# Altium PCB KDWM1000_Pcb.PcbDoc
Units mil, origin at the board's own origin, x right, y up, seen from the top; angles counter-clockwise.
Board outline 1300 x 1600 mil, 2 copper layers (Top Layer, Bottom Layer), stack 12.8 mil thick; 53 components, 66 nets, 250 pads, 154 vias.
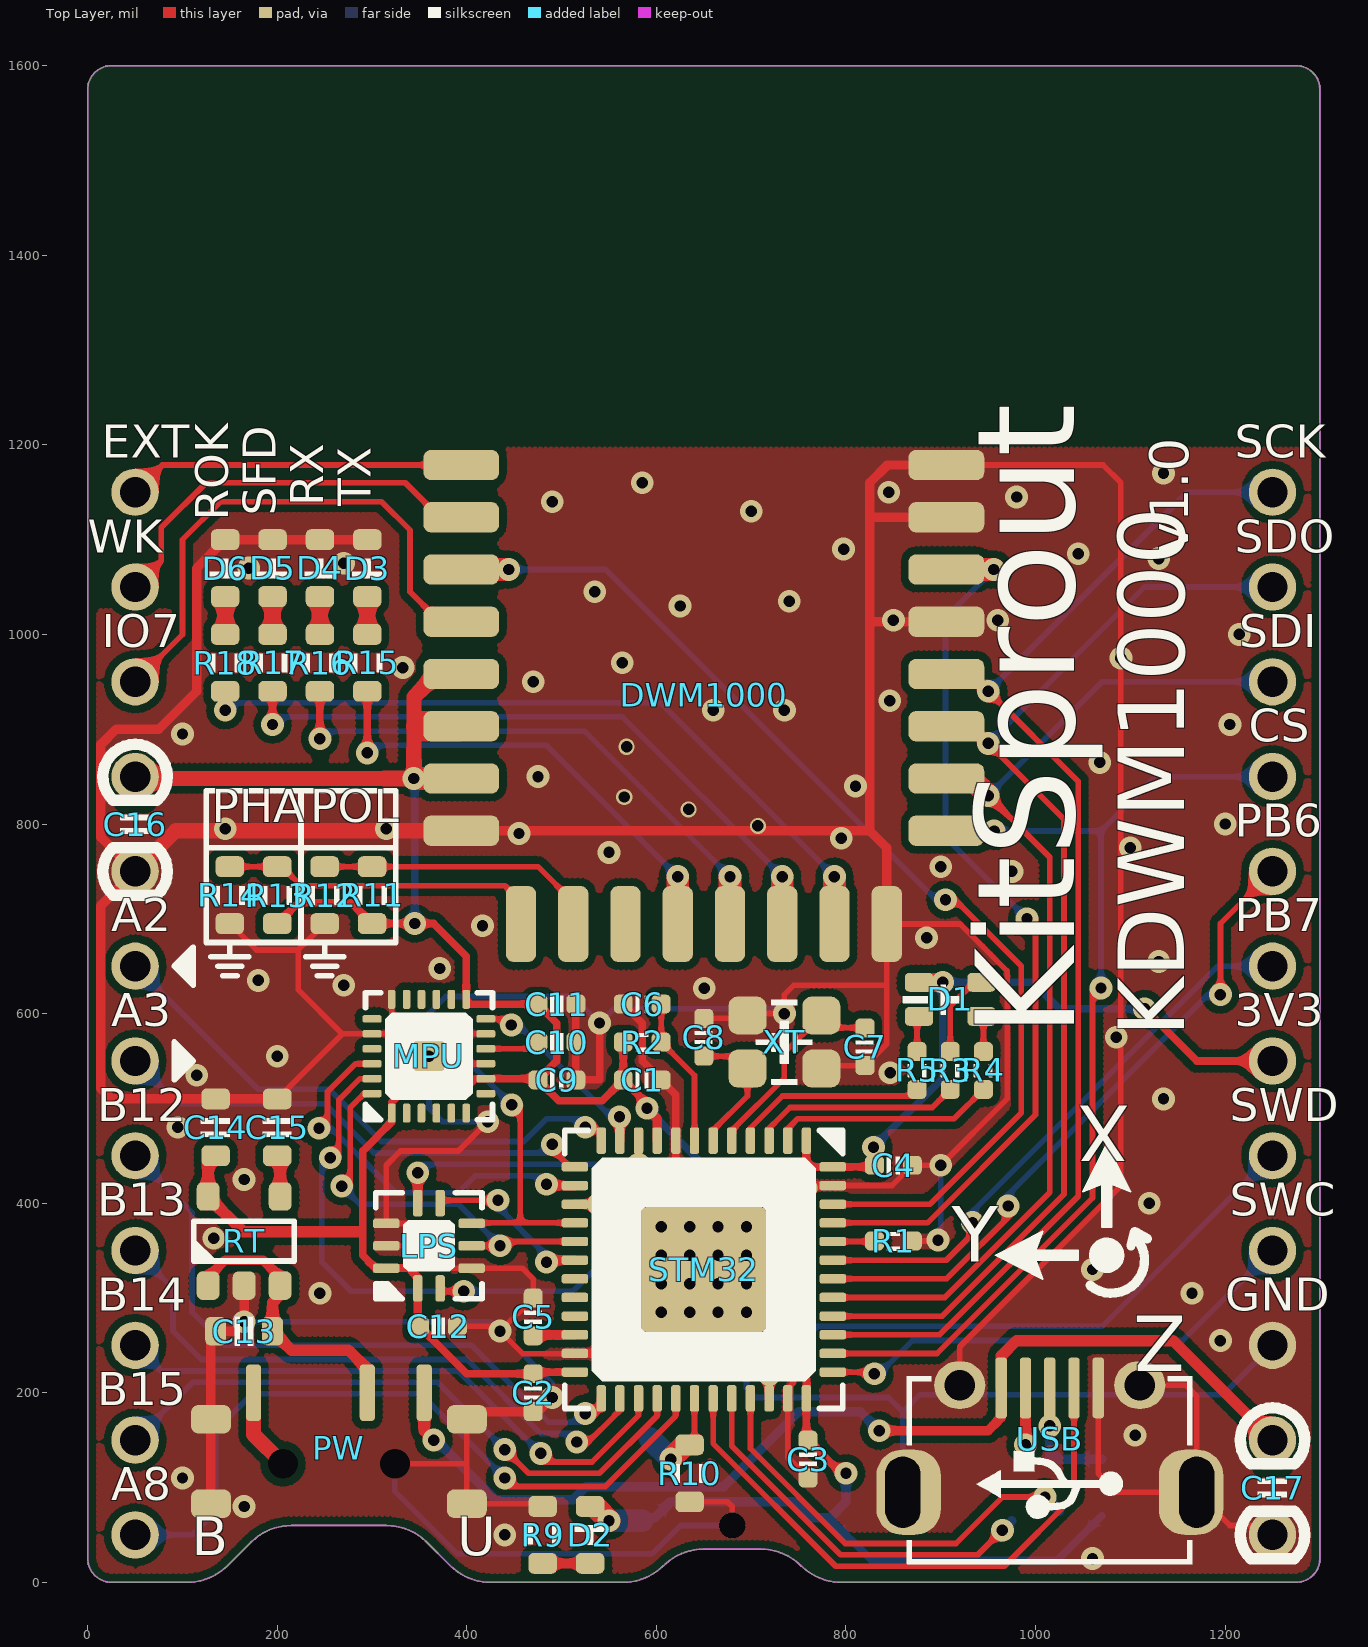
[diagram p0: Top Layer view]
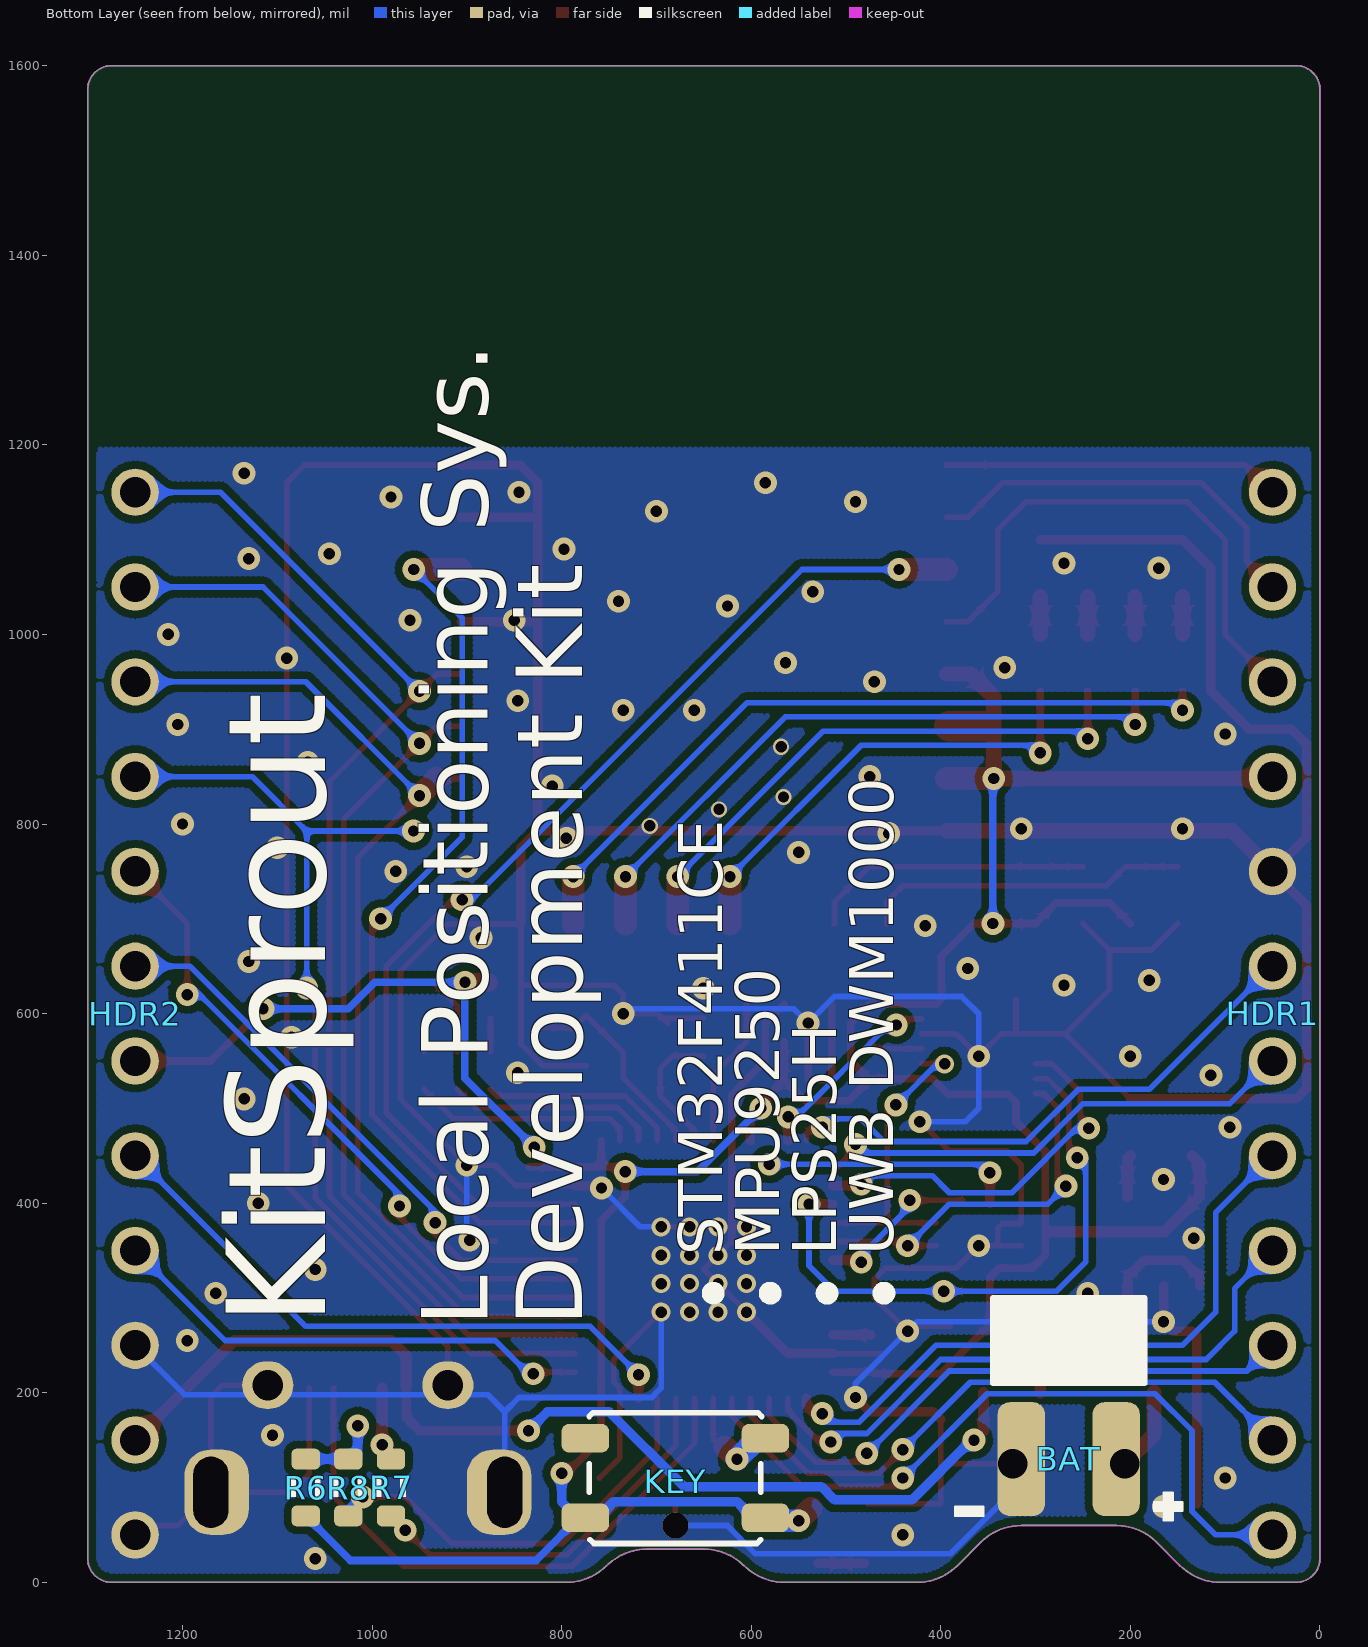
[diagram p1: Bottom Layer view, seen from below]
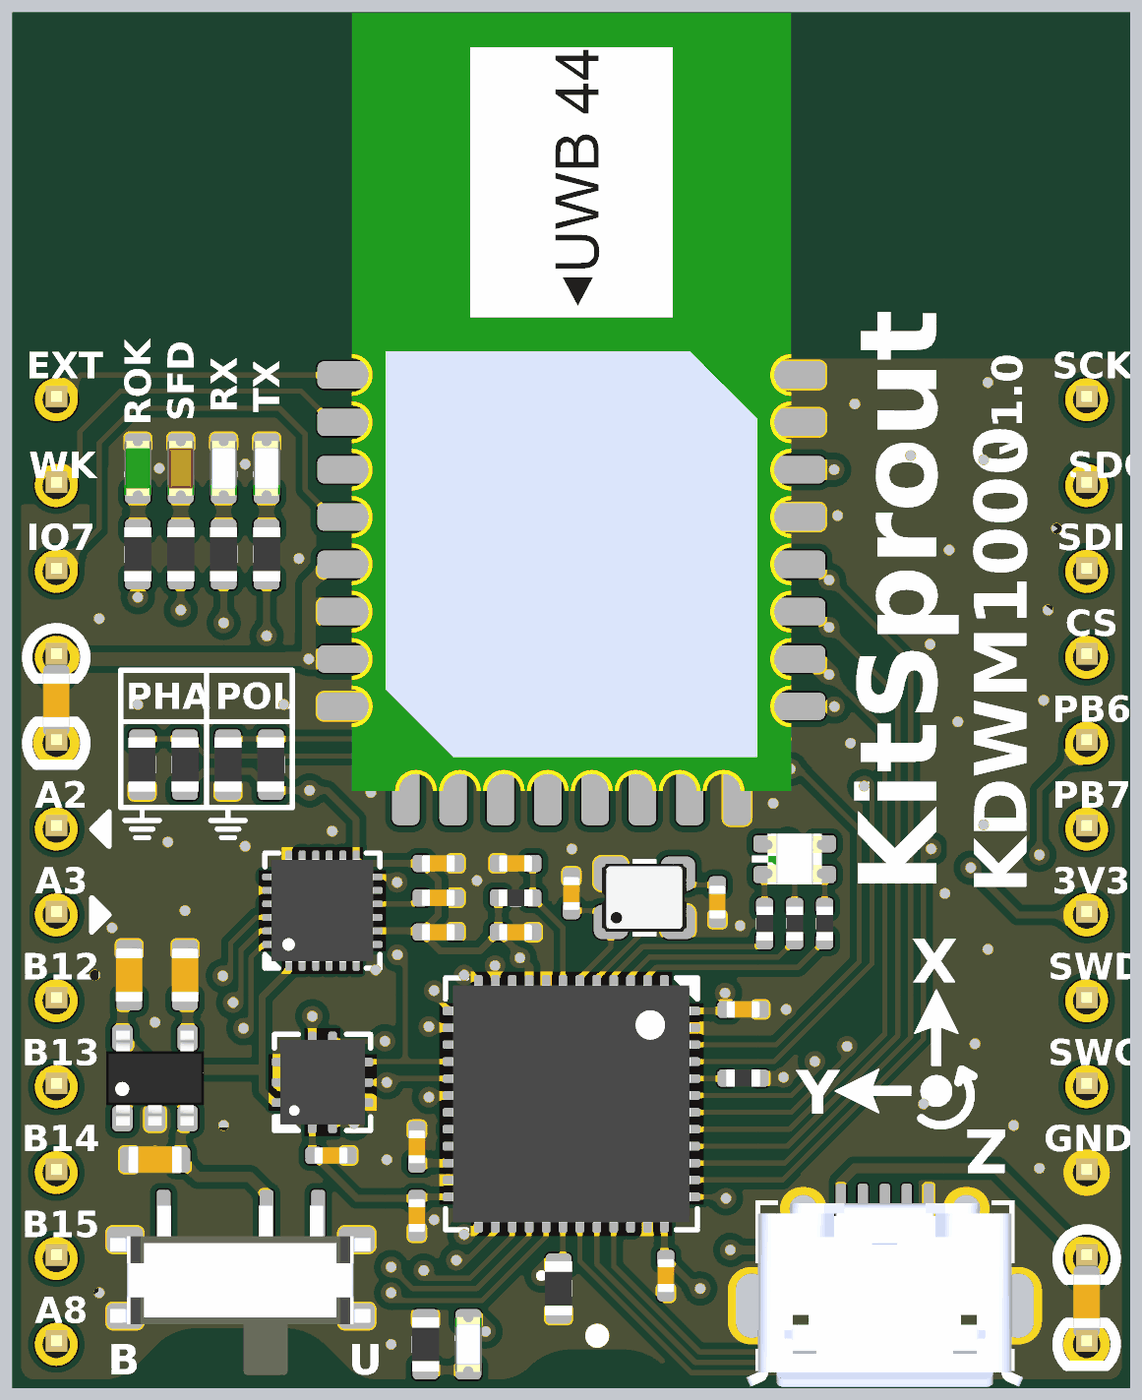
[diagram p2: 3D render of the assembled board from above, using the file's embedded part models]
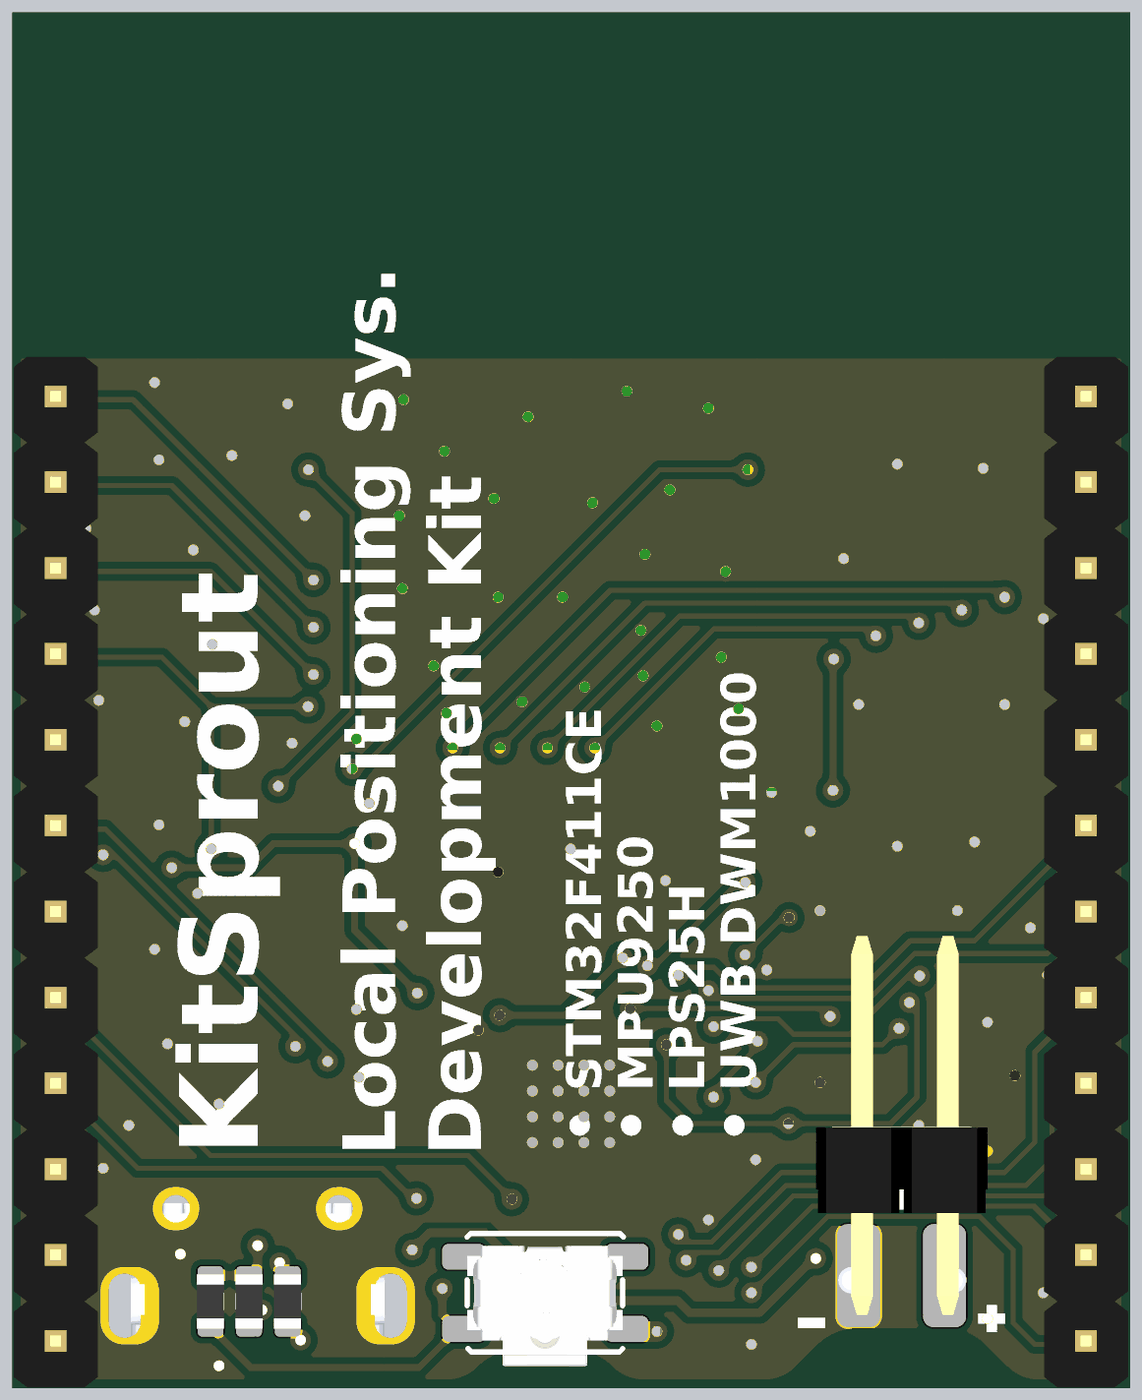
[diagram p3: 3D render of the assembled board from below, using the file's embedded part models]

## Layer stack, top to bottom
Top Solder: solder mask 0.4, Solder Resist, Dk 3.5
Top Layer: signal copper 1.4
Dielectric 1: core 10, Dk 4.2
Bottom Layer: signal copper 1.4
Bottom Solder: solder mask 0.4, Solder Resist, Dk 3.5

## Board outline
25,0 105,0 ccw(c105,60.36) 147.68,17.68 172.32,42.32 cw(c215,-0.36) 215,60 315,60 cw(c315,-0.36) 357.68,42.32 382.32,17.68 ccw(c425,60.36) 425,0 565,0 ccw(c565,60.36) 607.68,17.68 607.32,17.32 cw(c650,-25.36) 650,35 710,35 cw(c710,-25.36) 752.68,17.32 752.32,17.68 ccw(c795,60.36) 795,0 1275,0 ccw(c1275,25) 1300,25 1300,1575 ccw(c1275,1575) 1275,1600 25,1600 ccw(c25,1575) 0,1575 0,25 ccw(c25,25)

## Design rules (kind name [scope] priority, off if disabled: settings)
Clearance ClearancePolygon [InPolygon] p1: gap=8
Clearance [All] p2: gap=6
ComponentClearance [All] p1: gap=0 collisioncheckmode=3 verticalgap=0 showdistances=FALSE
Height [All] p1: minheight=0 maxheight=5000 prefheight=500
HoleSize [All] p1: absolutevalues=TRUE maxlimit=200 minlimit=1 maxpercent=80.000 minpercent=20.000
HoleToHoleClearance [All] p1: gap=6 allowstackedmicrovias=TRUE
MinimumSolderMaskSliver [All] p1: minsoldermaskwidth=0
PolygonConnect [All] p1: connectstyle=Direct reliefconductorwidth=10 reliefentries=4 polygonreliefangle="90 Angle" airgapwidth=10
RoutingVias [All] p1: holewidth=12 width=24 viastyle="Through Hole" minholewidth=12 minwidth=16 maxholewidth=28 maxwidth=50
SilkToSilkClearance [All] p1: silktosilkclearance=0
SilkToSolderMaskClearance [IsPad] p1: minsilkscreentomaskgap=0 clearancetoexposedcopper=TRUE
SolderMaskExpansion [All] p1: expansion=2
Width [All] p1: maxlimit=50 minlimit=6 preferedwidth=10
23 further rules are at their usual default settings.

## Components (designator, comment, footprint, x,y, rotation, side; value= is the part's Value field where it differs from the comment)
BAT "HDR1x2_2.54" HDR1X2_2.54_180HD 315,130 r90 bottom
C1 "Cap_0402" CAP_0402 585,530 r180 top
C2 "Cap_0402" CAP_0402 470,200 r90 top
C3 "Cap_0402" CAP_0402 760,130 r90 top
C4 "Cap_0402" CAP_0402 850,440 r180 top
C5 "Cap_0402" CAP_0402 470,280 r270 top
C6 "Cap_0402" CAP_0402 585,610 r180 top
C7 "Cap_0402" CAP_0402 820,565 r90 top
C8 "Cap_0402" CAP_0402 650,575 r270 top
C9 "Cap_0402" CAP_0402 495,530 r0 top
C10 "Cap_0402" CAP_0402 495,570 r0 top
C11 "Cap_0402" CAP_0402 495,610 r180 top
C12 "Cap_0402" CAP_0402 370,270 r0 top
C13 "Cap_0603" CAP_0603 165,265 r0 top
C14 "Cap_0603" CAP_0603 135,480 r270 top
C15 "Cap_0603" CAP_0603 200,480 r270 top
C16 "Cap_0603" CAP_0603 50,800 r270 top
C17 "Cap_0603" CAP_0603 1250,100 r270 top
D1 "LED_1616_RGB" LED_1616_RGB 910,615 r180 top
D2 "LED_0603" LED_0603_YELLOW 530,50 r270 top
D3 "LED_0603" LED_0603_YELLOW 295,1070 r90 top
D4 "LED_0603" LED_0603_YELLOW 245,1070 r90 top
D5 "LED_0603" LED_0603_RED 195,1070 r90 top
D6 "LED_0603" LED_0603_GREEN 145,1070 r90 top
DWM1000 "DWM1000" DWM1000 650,694.49 r0 top locked
HDR1 "HDR1x12_2.54" HDR1X12_2.54_180 50,1150 r180 bottom
HDR2 "HDR1x12_2.54T" HDR1X12_2.54_180 1250,1150 r180 bottom
KEY "ButtonTACT" ButtonTACT_3.5*3.55_90 680,110 r0 bottom
LPS "LPS25Hx" HCLGA-10L 360,355 r90 top
MPU "MPU925x" QFN_P0.4_24 360,555 r90 top
PW "SwitchSPDT_2.8x6.6_90" SwitchSPDT_2.8X6.6_90 265,125 r0 top
R1 "Res_0402" RES_0402 850,360 r180 top
R2 "Res_0402" RES_0402 585,570 r180 top
R3 "Res_0402" RES_0402 910,540 r90 top
R4 "Res_0402" RES_0402 945,540 r90 top
R5 "Res_0402" RES_0402 875,540 r90 top
R6 "Res_0603" RES_0603 1070,100 r90 bottom
R7 "Res_0603" RES_0603 980,100 r270 bottom
R8 "Res_0603" RES_0603 1025,100 r270 bottom
R9 "Res_0603" RES_0603 480,50 r270 top
R10 "Res_0603" RES_0603 635,115 r90 top
R11 "Res_0603" RES_0603 300,725 r270 top
R12 "Res_0603" RES_0603 250,725 r90 top
R13 "Res_0603" RES_0603 200,725 r270 top
R14 "Res_0603" RES_0603 150,725 r90 top
R15 "Res_0603" RES_0603 295,970 r270 top
R16 "Res_0603" RES_0603 245,970 r270 top
R17 "Res_0603" RES_0603 195,970 r270 top
R18 "Res_0603" RES_0603 145,970 r270 top
RT "RT9193" SOT23-5 165,360 r90 top
STM32 "STM32F4x1C" QFN_P0.5_48 650,330 r270 top
USB "USB_Micro" USB_Micro-AB 1015,105 r180 top
XT "XTAL_2520_4P" XT_2520_4 735,570 r0 top

## Footprints (in the part's own frame and the unit in brackets; to place one, negate y for a bottom-side part, rotate by r counter-clockwise, add the part's x,y. Pads: shape width x height; smd on the part's side, far side on the other; paste and mask are expansions set on the pad)
ButtonTACT_3.5*3.55_90 [mil]
  round 27.56 hole 27.56 mask+0: 0(0,50)
  rrect50% 50x30 smd: 1(-95,42) 2(-95,-42) 3(95,42) 4(95,-42)
  silkscreen extent -91,-69 91,69, body extent -90,-55 91,85, height 56
CAP_0402 [mil]
  rrect50% 20x20 smd: 1(-20,0) 2(20,0)
  silkscreen extent -7,-9 7,9, body extent -20,-10 20,10, height 20
CAP_0603 [mil]
  rrect50% 22x30 smd: 1(-30,0) 2(30,0)
  silkscreen extent -10,-15 10,15, body extent -31,-16 31,16, height 31
DWM1000 [mil]
  rrect50% 80x32 smd: 1(-255.91,484.25) 2(-255.91,429.13) 3(-255.91,374.02) 4(-255.91,318.9) 5(-255.91,263.78) 6(-255.91,208.66) 7(-255.91,153.54) 8(-255.91,98.43) 17(255.91,98.43) 18(255.91,153.54) 19(255.91,208.66) 20(255.91,263.78) 21(255.91,318.9) 22(255.91,374.02) 23(255.91,429.13) 24(255.91,484.25)
  rrect50% 32x80 smd: 9(-192.91,0) 10(-137.8,0) 11(-82.68,0) 12(-27.56,0) 13(27.56,0) 14(82.68,0) 15(137.8,0) 16(192.91,0)
  body extent -256,0 256,906, height 114
HCLGA-10L [mil]
  rrect50% 28x10 smd: 1(-45,11.81) 2(-45,-11.81) 6(45,-11.81) 7(45,11.81)
  rrect50% 10x28 smd: 3(-23.62,-45) 4(0,-45) 5(23.62,-45) 8(23.62,45) 9(0,45) 10(-23.62,45)
  silkscreen extent -56,-56 56,56, body extent -49,-49 49,49, height 31
HDR1X2_2.54_180HD [mil]
  rrect50% 120x50 smd: 1(0,0) 2(0,-100)
  silkscreen extent 80,-130 170,30, body extent -45,-150 395,50, height 101
HDR1X12_2.54_180 [mil]
  round 50 hole 32: 1(0,0) 2(0,-100) 3(0,-200) 4(0,-300) 5(0,-400) 6(0,-500) 7(0,-600) 8(0,-700) 9(0,-800) 10(0,-900) 11(0,-1000) 12(0,-1100)
  body extent -49,-1150 49,50, height 323
LED_0603_GREEN [mil]
  rrect50% 22x30 smd: 1(-30,0) 2(30,0)
  silkscreen extent -10,-16 10,16, body extent -32,-16 32,16, height 24
LED_0603_RED [mil]
  rrect50% 22x30 smd: 1(-30,0) 2(30,0)
  silkscreen extent -10,-16 10,16, body extent -32,-16 32,16, height 24
LED_0603_YELLOW [mil]
  rrect50% 22x30 smd: 1(-30,0) 2(30,0)
  silkscreen extent -10,-16 10,16, body extent -32,-16 32,16, height 24
LED_1616_RGB [mil]
  rrect50% 30x20 smd: 1(-33,-18) 2(-33,18) 3(33,18) 4(33,-18)
  silkscreen extent -10,-16 50,16, body extent -31,-30 31,30, height 13
QFN_P0.4_24 [mil]
  rrect20% 32x32 smd: 0(0,0)
  rrect50% 20x8 smd: 1(-60,39.37) 2(-60,23.62) 3(-60,7.87) 4(-60,-7.87) 5(-60,-23.62) 6(-60,-39.37) 13(60,-39.37) 14(60,-23.62) 15(60,-7.87) 16(60,7.87) 17(60,23.62) 18(60,39.37)
  rrect50% 8x20 smd: 7(-39.37,-60) 8(-23.62,-60) 9(-7.87,-60) 10(7.87,-60) 11(23.62,-60) 12(39.37,-60) 19(39.37,60) 20(23.62,60) 21(7.87,60) 22(-7.87,60) 23(-23.62,60) 24(-39.37,60)
  silkscreen extent -67,-67 67,67, body extent -60,-60 60,60, height 39
QFN_P0.5_48 [mil]
  rrect10% 132x132 smd: 0(0,0)
  rrect50% 28x10 smd: 1(-136,108.27) 2(-136,88.58) 3(-136,68.9) 4(-136,49.21) 5(-136,29.53) 6(-136,9.84) 7(-136,-9.84) 8(-136,-29.53) 9(-136,-49.21) 10(-136,-68.9) 11(-136,-88.58) 12(-136,-108.27) 25(136,-108.27) 26(136,-88.58) 27(136,-68.9) 28(136,-49.21) 29(136,-29.53) 30(136,-9.84) 31(136,9.84) 32(136,29.53) 33(136,49.21) 34(136,68.9) 35(136,88.58) 36(136,108.27)
  rrect50% 10x28 smd: 13(-108.27,-136) 14(-88.58,-136) 15(-68.9,-136) 16(-49.21,-136) 17(-29.53,-136) 18(-9.84,-136) 19(9.84,-136) 20(29.53,-136) 21(49.21,-136) 22(68.9,-136) 23(88.58,-136) 24(108.27,-136) 37(108.27,136) 38(88.58,136) 39(68.9,136) 40(49.21,136) 41(29.53,136) 42(9.84,136) 43(-9.84,136) 44(-29.53,136) 45(-49.21,136) 46(-68.9,136) 47(-88.58,136) 48(-108.27,136)
  silkscreen extent -147,-147 147,147, body extent -139,-139 139,139, height 22
RES_0402 [mil]
  rrect50% 20x20 smd: 1(-20,0) 2(20,0)
  silkscreen extent -7,-10 7,10, body extent -20,-10 20,10, height 14
RES_0603 [mil]
  rrect50% 22x30 smd: 1(-30,0) 2(30,0)
  silkscreen extent -10,-16 10,16, body extent -31,-16 31,16, height 18
SOT23-5 [mil]
  rrect50% 30x24 smd: 1(-47,38) 2(-47,0) 3(-47,-38) 4(47,-38) 5(47,38)
  silkscreen extent -21,-53 21,53, body extent -55,-57 55,57, height 57
SwitchSPDT_2.8X6.6_90 [mil]
  rrect50% 42x30 smd: 0(-135,-42) 0(-135,47) 0(135,-42) 0(135,47)
  round 10 hole 31.5: 0(-59.06,0) 0(59.06,0)
  rrect50% 16x60 smd: 1(90,75) 2(30,75) 3(-90,75)
  body extent -152,-111 151,86, height 55
USB_Micro-AB [mil]
  rrect80% 68x90 hole 37 slot 75 at 90 deg copper offset 6,0 mask+0: 0(-155,10)
  oval 54x50 hole 32 mask+0: 0(-95,-103) 0(95,-103)
  rrect80% 68x90 hole 37 slot 75 at 90 deg copper offset -6,0 mask+0: 0(155,10)
  rrect50% 12x64 smd: 1(51.18,-100) 2(25.59,-100) 3(0,-100) 4(-25.59,-100) 5(-51.18,-100)
  silkscreen extent -150,-113 150,86, body extent -161,-109 161,104, height 108
XT_2520_4 [mil]
  rrect50% 40x40 smd: 1(39,28) 2(-39,28) 3(-39,-28) 4(39,-28)
  silkscreen extent -30,-44 30,44, body extent -49,-39 49,39, height 31

## Part data
BAT: library part HDR1x2_2.54T, "Header"
C1 C2 C3 C4 C5 C6 C7 C8 C9 C10 C11 C12 C13 C14 C15 C16 C17: "Capacitor"
D1 D2 D3 D4 D5 D6: "LED"
DWM1000: "Module"
HDR1 HDR2: "Header"
KEY: "Button"
LPS: "Sensor Pressure"
MPU: "Sensor Motion"
PW: "Switch"
R1 R2 R3 R4 R5 R6 R7 R8 R9 R10 R11 R12 R13 R14 R15 R16 R17 R18: "Resistor"
RT: "Power"
STM32: "MCU"
USB: "USB"
XT: "Crystal Oscillator"

## Via types
v1: diameter 24, hole 12, Top Layer to Bottom Layer, 133 vias
v2: diameter 20, hole 12, Top Layer to Bottom Layer, 17 vias
v3: diameter 17, hole 12, Top Layer to Bottom Layer, 4 vias

## Nets (pads, with @x,y where several pads share a name; then routed paths per layer and width w, separated by ;. In a path a pad name is that pad's centre, name@x,y a point inside that pad or via, vN(x,y) a via of type N, cw(c..) or ccw(c..) an arc to the next point about the centre after c; other vN are vias at no path point)
3V3: C1.2 C2.2 C3.2 C4.2 C9.1 C11.2 C12.1 C14.2 C16.1 D1.4 D2.1 DWM1000.5 DWM1000.6 DWM1000.7 HDR1.4 HDR2.7 KEY.1 KEY.3 LPS.1 LPS.10 MPU.1 MPU.8 MPU.13 R2.2 R6.1 R11.2 R13.2 RT.5 STM32.1 STM32.9 STM32.24 STM32.36 STM32.48 | length 4136.4
  Top Layer w8: R13.2 222,717 278,717 R11.2 365,695 399.37,660.63 MPU.13 404.37,610 C11.2 495,590 495,550 C9.1 497,508 543,508 C1.2 ; C12.1@348.19,266.81 LPS.1 348.19,321.81 338.62,331.38 LPS.10 303.62,331.38 290,345 290,455 320.63,485.63 MPU.1 320.63,506.22 329.41,515 392.28,515 408.66,531.38 MPU.8 C9.1@475,531.38 ; C12.1 400,220 C2.2 ; C2.2@471.73,221.73 STM32.24 ; R2.2 C1.2 ; v1@595,500 C1.2 ; v1(733,433.27) 733,407 758.27,381.73 STM32.36@758.27,186.73 ; v1@738,438.27 758.27,438.27 ; C3.2@758.27,145 STM32.36 ; STM32.1 758.27,438.27 ; C3.2 v1@800,110 ; C4.2@834,438.27 STM32.48 758.27,438.27 ; v1(1115,605) 1170,550 HDR2.7
  Top Layer w10: v1(590,500) 600.79,489.21 STM32.9
  Top Layer w12: C14.2 127,442 RT.5 164,370 285,370
  Top Layer w16: HDR1.4@50,848.03 v1(344.09,848.03) 344.09,934.09 368.27,958.27 DWM1000.5
  Top Layer w20: D1.4 v1(902,633)
  Top Layer w24: v1(344.09,848.03) DWM1000.7 ; D2.1@537,78 v1(550,65)
  Top Layer w32: 352,903.15 DWM1000.6@391.09,903.15
  Bottom Layer w8: v1(345,695) v1@345,848.03 ; v1(590,500) 656.73,433.27 v1(733,433.27) ; KEY.3@782,68 827,23 1023,23 R6.1 ; v1(829,459) 902,532 v1(902,633) 997,633 1025,605 v1(1115,605)
  Bottom Layer w10: KEY.1 598,68 615,85 745,85 762,68 KEY.3 782,68 783,68 800,85 v1@800,110
  Bottom Layer w24: v1(550,65) KEY.1@585,65
  other v1: 800,115
5V: C17.1 HDR2.11 PW.1 USB.1 | length 1128.8
  Top Layer w10: v1(835,160) 950,160 963.82,173.82 USB.1
  Top Layer w12: PW.1 355,160 v1(365,150) ; USB.1 963.82,238.82 980,255 1145,255 1240,160 HDR2.11@1250,160
  Bottom Layer w10: v1(365,150) 367.47,150 430.47,87 512,87 526,101 671,101 750,180 815,180 v1(835,160)
BOOT: R1.2 STM32.44 | length 44
  Top Layer w6: STM32.44 R1.2@830,359.53
CSB: LPS.6 STM32.18 | length 173.1
  Top Layer w6: LPS.6@376.81,403 v1@437.81,403
  Top Layer w10: v1@489,339.84 STM32.18
  Bottom Layer w6: v1@427.42,401.42 v1@489,339.84
  other v1: 484,337.84 432.81,403
CSM: MPU.22 STM32.14 | length 400.4
  Top Layer w6: v1@253,479 253,517.49 282.64,547.13 MPU.22 ; v1@484,415 v1@487.58,418.58
  Top Layer w10: v1@487.58,418.58 STM32.14
  Bottom Layer w6: v1@251,485 325,411 391,411 409,429 v1@484,429
  other v1: 484,420 244,479
D_CS: DWM1000.17 HDR2.4 STM32.38 | length 1044.6
  Top Layer w6: STM32.38 896.03,241.42 1060,405.39 v1@1060,625
  Bottom Layer w6: v1(956.26,792.56) 1069,792.56 ; v1(1069,627) 1069,792.56 ; HDR2.4 1126.44,850 1069,792.56
D_EXTON: DWM1000.1 HDR1.1 | length 356
  Top Layer w6: HDR1.1 78.74,1178.74 DWM1000.1
D_EXTPA: DWM1000.11
D_GPIO7: DWM1000.4 HDR1.3 | length 571.9
  Top Layer w6: HDR1.3 100,1000 100,1100 140,1140 310,1140 340,1110 340,1045 371.61,1013.39 DWM1000.4
D_IRQ: DWM1000.22 STM32.45 | length 945.7
  Top Layer w6: STM32.45@787.79,381 STM32.45 885.88,379.21 1000,493.33 v1@1000,700
  Top Layer w24: DWM1000.22 v1(955.91,1068.5)
  Bottom Layer w6: v1(955.91,1068.5) 905,1017.6 905,786 v1(991,700)
D_PHA: DWM1000.9 R13.1 R14.2 | length 345.9
  Top Layer w6: R14.2 R13.1 205,755 225,735 440,735 457.09,717.91 DWM1000.9
D_POL: DWM1000.10 R11.1 R12.2 | length 305.9
  Top Layer w6: R12.2 R11.1@305,755 ; R11.1 475,755 512.2,717.8 DWM1000.10
D_RST: DWM1000.3 STM32.46 | length 1145
  Top Layer w6: STM32.46 888.6,398.9 985,495.3 985,650 v1@915,720
  Top Layer w24: DWM1000.3 v1(444.09,1068.5)
  Bottom Layer w6: v1(444.09,1068.5) 546.5,1068.5 v1@900,715
  other v1: 905,720
D_RX: DWM1000.13 R16.2 | length 596.1
  Top Layer w8: v1(245,890) R16.2
  Top Layer w24: DWM1000.13 v1(677.56,744.49)
  Bottom Layer w6: v1@245,898 524.05,898 v1(677.56,744.49)
D_RXOK: DWM1000.15 R18.2 | length 788.8
  Top Layer w8: v1(145,920) R18.2
  Top Layer w24: DWM1000.15 v1(787.8,744.49)
  Bottom Layer w6: v1@145,928 604.28,928 v1(787.8,744.49)
D_SCK: DWM1000.20 HDR2.1 STM32.39 | length 1330.2
  Top Layer w6: STM32.39 898.74,261.1 1045,407.36 1045,845 v1(950,940) 931.73,958.27 DWM1000.20
  Bottom Layer w6: v1(950,940) 1160,1150 HDR2.1
D_SDI: DWM1000.18 HDR2.3 STM32.41 | length 1121.8
  Top Layer w6: STM32.41 904.17,300.47 1015,411.3 1015,765 v1(950,830) ; DWM1000.18 DWM1000.18@931.97,848.03
  Top Layer w24: DWM1000.18@931.97,848.03 v1(950,830)
  Bottom Layer w6: v1(950,830) 1070,950 HDR2.3
D_SDO: DWM1000.19 HDR2.2 STM32.40 | length 1226
  Top Layer w6: STM32.40 901.46,280.79 1030,409.33 1030,805 v1(950,885) 931.85,903.15 DWM1000.19
  Bottom Layer w6: v1(950,885) 1115,1050 HDR2.2
D_SFD: DWM1000.14 R17.2 | length 692.5
  Top Layer w8: v1(195,905) R17.2
  Top Layer w24: DWM1000.14 v1(732.68,744.49)
  Bottom Layer w6: v1@195,913 564.17,913 v1(732.68,744.49)
D_TX: DWM1000.12 R15.2 | length 499.8
  Top Layer w8: v1(295,875) R15.2
  Top Layer w24: DWM1000.12 v1(622.44,744.49)
  Bottom Layer w6: v1@295,883 483.93,883 v1(622.44,744.49)
D_WAKE: DWM1000.2 HDR1.2 | length 425.2
  Top Layer w6: HDR1.2 77.5,1077.5 77.5,1112.5 125,1160 335,1160 371.38,1123.62 DWM1000.2
GND: BAT.1 C1.1 C2.1 C3.1 C4.1 C5.1 C6.2 C7.1 C8.1 C9.2 C10.2 C11.1 C12.2 C13.1 C14.1 C15.1 C16.2 C17.2 D3.2 D4.2 D5.2 D6.2 DWM1000.8 DWM1000.16 DWM1000.21 DWM1000.23 DWM1000.24 HDR1.5 HDR2.10 HDR2.12 KEY.0 LPS.3 LPS.8 LPS.9 MPU.0 MPU.11 MPU.18 MPU.20 PW.0@130,83 PW.0@130,172 PW.0@324.06,125 PW.0@400,83 PW.0@400,172 R1.1 R9.1 R10.1 R12.1 R14.1 RT.2 STM32.0 STM32.8 STM32.23 STM32.35 STM32.47 USB.0 USB.5 XT.2 XT.4 | length 10273.6
  Top Layer w6: R14.1 178,667 222,667 ; C15.1 268.62,578.62 ; R12.1 222,667 ; LPS.9 v1(360,355) 383.62,331.38 LPS.3 458.62,331.38 470,320 C5.1 v1(435,265) ; MPU.18 320.63,578.62 ; PW.0@324.06,125 400,125 ; 340,355 340,373.62 335,378.62 LPS.8 315,440 330,455 391,455 v1(422,486) ; C12.2 v1@435,270 ; PW.0@400,172 400,125 ; MPU.11 383.62,578.62 v1(360,555) 336.38,578.62 320.63,578.62 ; v1@435.1,265.1 459.2,241 514,241 STM32.23 ; R9.1@477,83 400,83 400,125 ; v2(605,285) STM32.0 STM32.0@620.47,359.53 ; v2(605,375) v2(695,375) ; R10.1 675,85 680,80 KEY.0 ; C8.1 XT.2@696,595 ; XT.2@688,590 XT.2 ; v2(695,285) 745,235 745,211 738.58,204.58 STM32.35 738.58,131.42 C3.1 ; XT.2@698,600 v1(735,600) 735,620 745,630 842.91,630 ; XT.4@774,545 C7.1 842.91,567.91 DWM1000.16 920.51,694.49 970,645 970,510 v1(900,440) C4.1 848.58,418.58 STM32.47 ; USB.0@860,95 USB.0@860,105 ; R1.1 v1@898,360 ; DWM1000.24 1071.26,1178.74 1090,1160 1090,418.42 920,248.42 USB.0@920,208 ; USB.5 1066.18,114.82 1086,95 USB.0@1170,95 ; USB.0@1110,208 1158,208 1170,196 USB.0@1170,95 ; C17.2@1250,60 1205,60 USB.0@1170,95 ; 222,667 222,625.24 268.62,578.62 ; 268.62,578.62 MPU.20 320.63,578.62
  Top Layer w8: C11.1 C10.2 C9.2 540,530 v1(540,590) ; C6.2 585,590 585,550 C1.1 620.47,514.53 STM32.8 STM32.0@620.47,359.53
  Top Layer w10: PW.0@130,83 130,172 130,260 C13.1 155,265 v1(165,275) RT.2 ; C15.1 C14.1 25,510 14,521 14,714 HDR1.5 14,786 14,884 30,900 75,900 115,940 115,1070 D6.2 D5.2 D4.2 D3.2 ; DWM1000.8 825,792.91 ; PW.0@400,172 408,180 C2.1 475,180 v1(490,195) ; STM32.23 561.42,241.42 v2(605,285) ; v1(758,416) 760.58,418.58 STM32.47 ; DWM1000.16 842.91,775 825,792.91 ; DWM1000.21 825,1013.39 ; DWM1000.23 825,1123.62 ; DWM1000.24 843.74,1178.74 825,1160 825,1123.62 ; 825,792.91 825,1013.39 ; 825,1013.39 825,1123.62
  Top Layer w16: HDR1.5 92.91,792.91 DWM1000.8
  Bottom Layer w6: v1(165,275) 425,275 v1(435,265) 490,210 v1(490,195) ; PW.0@324.06,125 324.06,95.94 390,30 595.33,30 625.33,60 KEY.0 ; v1(422,486) 374,486 360,500 v1(360,555) 360,600 378,618 512,618 v1(540,590) 555,605 v1@735,605 ; v2(695,285) 695,205 705,195 845,195 860,180 ; v2(695,375) 717,375 v1(758,416) ; USB.0@860,85 860,180 ; v1@900,358 v1(900,440) ; HDR2.10 1198,198 1110,198 878,198 860,180
  other v1: 1060,25 440,50 165,80 100,110 1105,155 1195,255 245,305 1165,305 1060,330 897,361 133,362.97 1120,400 165,425 95,480 1135,510 115,535 846.5,537.5 200,555 1085,575 650.5,626.75 270,630 180,635 371.43,647.5 1130,655 885,680 416.5,692.57 975,750 900,755 550,770 1100,775 795,785 455,790 145,795 315,795 1200,800 810,840 475,850 1067.73,865 100,895 1205,905 660,920 735,920 846.27,930 470,950 332.55,965 563.82,970 1090,975 1215,1000 850,1015 960,1015 625,1030 740,1035 535,1045 170,1070 270,1075 1130,1080 1045,1085 797.48,1090 700,1130 490,1140 980,1145 845,1150 585,1160 1135,1170
  other v2: 635,285 665,285 605,315 635,315 665,315 695,315 605,345 635,345 665,345 695,345 635,375 665,375
  other v3: 707,798 634,815.5 566,828.5 568.5,881.5
INTB: LPS.7 STM32.10 | length 258.1
  Top Layer w10: LPS.7 v1@348.19,425
  Bottom Layer w6: v1@348,441 v1(581.1,441)
  other v1: 348.19,432
INTM: MPU.12 STM32.11 | length 208.8
  Top Layer w6: MPU.12 440.63,594.37 v1(447,588)
  Top Layer w10: STM32.11 v1@561.42,491
  Bottom Layer w6: v1(447,588) 455,588 552,491 v1(561,491)
KEY: KEY.2 R10.2 STM32.30 | length 93.3
  Top Layer w6: R10.2@640.16,150.16 STM32.30
  Top Layer w24: v1(615,130) R10.2@628,143
  Bottom Layer w24: KEY.2@593,152 v1(615,130)
LED_B: R5.1 STM32.4 | length 205.9
  Top Layer w6: STM32.4 699.21,479.21 733,513 868,513 R5.1
LED_G: R4.1 STM32.2 | length 236.2
  Top Layer w6: STM32.2 738.58,478.58 749,489 914,489 R4.1
LED_R: R3.1 STM32.3 | length 221
  Top Layer w6: STM32.3 718.9,478.9 741,501 891,501 R3.1
NetC15_2: C15.2 RT.4 | length 44.2
  Top Layer w12: C15.2 203,447 RT.4
NetD1_1: D1.1 R3.2 | length 91.4
  Top Layer w6: R3.2 910,608 935,633 D1.1
NetD1_2: D1.2 R4.2 | length 37.8
  Top Layer w6: D1.2 945,595 R4.2
NetD1_3: D1.3 R5.2 | length 35
  Top Layer w6: R5.2 D1.3@875,595
NetD2_2: D2.2 R9.2 | length 50
  Top Layer w10: R9.2 D2.2
NetD3_1: D3.1 R15.1 | length 40
  Top Layer w16: R15.1 D3.1
NetD4_1: D4.1 R16.1 | length 40
  Top Layer w16: R16.1 D4.1
NetD5_1: D5.1 R17.1 | length 40
  Top Layer w16: R17.1 D5.1
NetD6_1: D6.1 R18.1 | length 40
  Top Layer w16: R18.1 D6.1
NetR6_2: R6.2 R8.1 USB.3 | length 84.1
  Bottom Layer w10: R8.1@1015,130 R8.1@1015,140 ; v1@1015,155 R8.1@1015,140 ; R6.2 R8.1 R8.1@1015,140
  other v1: 1015,165
NetR7_1: R7.1 USB.2 | length 60
  Top Layer w12: v1(989.41,145) USB.2
PA2: HDR1.6 STM32.12 | length 585.4
  Top Layer w6: v1@525,485 530,485 STM32.12@541.73,473.27 ; STM32.12 STM32.12@541.73,468.27
  Bottom Layer w6: HDR1.6 180,520 255,520 310,465 460,465 484,489 v1@525,489
  other v1: 525,480
PA3: HDR1.7 STM32.13 | length 511.9
  Top Layer w6: v1@490,457 508.73,438.27 STM32.13
  Bottom Layer w6: HDR1.7 95,505 250,505 302,453 v1@490,453
  other v1: 490,462
PA8: HDR1.12 STM32.29 | length 768.2
  Top Layer w6: v1@440,101 546,101 620.47,175.47 STM32.29
  Bottom Layer w6: HDR1.12 110,50 135,75 135,160 174,199 351,199 v1(440,110)
PB1: STM32.19
PB2: STM32.20
PB6: HDR2.5 STM32.42 | length 690.6
  Top Layer w6: STM32.42 906.16,320.16 v1@978,392 ; v1(1195,620) 1195,695 HDR2.5
  Bottom Layer w6: v1@965,403 v1@1188.5,626.5
  other v1: 971,397
PB7: HDR2.6 STM32.43 | length 599.5
  Top Layer w6: STM32.43 905.84,339.84 v1@939.5,373.5
  Bottom Layer w6: v1@927.5,385.5 1192,650 HDR2.6
  other v1: 933.5,379.5
PB10: STM32.21
PB12: HDR1.8 STM32.25 | length 676.8
  Top Layer w10: v1@530,175 541.73,186.73 STM32.25
  Bottom Layer w6: HDR1.8 110,390 110,285 145,250 405,250 486,169 v1@525,169
  other v1: 525,178
PB13: HDR1.9 STM32.26 | length 639.2
  Top Layer w6: v1@523,143 561.42,181.42 STM32.26
  Bottom Layer w6: HDR1.9 90,310 90,265 120,235 400,235 478,157 v1@516,157
  other v1: 516,148
PB14: HDR1.10 STM32.27 | length 614.6
  Top Layer w6: v1@480,127 532,127 581.1,176.1 STM32.27
  Bottom Layer w6: HDR1.10 77,223 391,223 v1(478,136)
PB15: HDR1.11 STM32.28 | length 659.2
  Top Layer w6: v1(440,140) 465,115 540,115 600.79,175.79 STM32.28
  Bottom Layer w6: HDR1.11 111,211 369,211 v1(440,140)
REG: C10.1 MPU.10 | length 58
  Top Layer w6: MPU.10 467.87,562.87 C10.1
RST: C6.1 R2.1 STM32.7 | length 158.6
  Top Layer w6: C6.1 R2.1 640.16,534.84 STM32.7
SCK: LPS.2 MPU.23 STM32.15 | length 646.2
  Top Layer w6: v1@265,448 265,509 287.38,531.38 MPU.23 ; LPS.2@371.81,307 v1(396.81,307)
  Top Layer w10: STM32.15 v1(539,398.9)
  Bottom Layer w6: v1@247,448 247,338 278,307 512,307 539,334 v1(539,398.9)
  other v1: 256,448
SDI: LPS.4 MPU.24 STM32.17 | length 414.2
  Top Layer w6: v1@277,418 277,501 291.63,515.63 MPU.24 ; LPS.4 v1(435,355) ; v1@435,359.53 STM32.17
  Bottom Layer w6: v1(268,418) 287,399 391,399 v1(435,355)
SDO: LPS.5 MPU.9 STM32.16 | length 330.1
  Top Layer w6: v2(396,547) 396.13,547.13 MPU.9 ; LPS.5@405,379.21 STM32.16 ; 456.37,379.21 v1@456.37,503.63
  Bottom Layer w6: v2(396,547) 400,551 v1(447.37,503.63)
SWCLK: HDR2.9 STM32.37 | length 522.7
  Top Layer w6: STM32.37 v1@823.27,221.73 ; v1@823.27,226.73 v1(830,220)
  Bottom Layer w6: v1@830,215 870,255 1155,255 HDR2.9
SWDIO: HDR2.8 STM32.34 | length 651.8
  Top Layer w10: STM32.34 v1(718.9,219)
  Bottom Layer w6: v1(718.9,219) 769.9,270 1070,270 HDR2.8
USB.DM: R7.2 STM32.32 | length 408.2
  Top Layer w6: STM32.32 679.53,143.7 794.23,29 939,29 v1(965,55)
  Bottom Layer w10: v1(965,55) R7.2@975,65
USB.DP: R8.2 STM32.33 | length 446.7
  Top Layer w6: STM32.33 699.21,140.99 799.2,41 916,41 965,90 v1(1010,90)
  Bottom Layer w10: v1(1010,90) R8.2@1025,75
USB.ID: STM32.31 USB.4 | length 626.8
  Top Layer w6: STM32.31 659.84,146.42 789.26,17 967,17 1040.59,90.59 USB.4
VBAT: BAT.2 PW.0@205.94,125 PW.3 | length 87.8
  Top Layer w16: PW.3 175,155.94 PW.0@205.94,125
VCAP: C5.2 STM32.22 | length 40.1
  Top Layer w10: C5.2@473.9,261.1 STM32.22
VIN: C13.2 PW.2 RT.1 RT.3 | length 301.8
  Top Layer w10: RT.1 127,322 145,340 185,340 203,322 RT.3
  Top Layer w12: RT.3 203,303 195,295 C13.2 215,245 275,245 295,225 PW.2
XT_I: C7.2 STM32.5 XT.1 | length 222.5
  Top Layer w6: STM32.5 679.53,476.58 735,532.05 735,559 XT.1 787,585 C7.2
XT_O: C8.2 STM32.6 XT.3 | length 142.4
  Top Layer w6: C8.2 683,555 XT.3 696,513 659.84,476.84 STM32.6
pads on no net: KEY.4 MPU.2 MPU.3 MPU.4 MPU.5 MPU.6 MPU.7 MPU.14 MPU.15 MPU.16 MPU.17 MPU.19 MPU.21

## Polygon pours and split planes (outlines as drawn)
no net on Keep-Out Layer "4" (none, remove dead copper): 25,0 105,0 ccw(c105,60.36) 147.68,17.68 172.32,42.32 cw(c215,-0.36) 215,60 315,60 cw(c315,-0.36) 357.68,42.32 382.32,17.68 ccw(c425,60.36) 425,0 565,0 ccw(c565,60.36) 607.68,17.68 607.32,17.32 cw(c650,-25.36) 650,35 710,35 cw(c710,-25.36) 752.68,17.32 752.32,17.68 ccw(c795,60.36) 795,0 1275,0 ccw(c1275,25) 1300,25 1300,1575 ccw(c1275,1575) 1275,1600 25,1600 ccw(c25,1575) 0,1575 0,25 ccw(c25,25)
GND on Top Layer "Top Layer" (hatched 45Degree grid 4 track 6, remove dead copper, pour order 0): 25,0 105,0 ccw(c105,60.36) 147.68,17.68 172.32,42.32 cw(c215,-0.36) 215,60 315,60 cw(c315,-0.36) 357.68,42.32 382.32,17.68 ccw(c425,60.36) 425,0 565,0 ccw(c565,60.36) 607.68,17.68 607.32,17.32 cw(c650,-25.36) 650,35 710,35 cw(c710,-25.36) 752.68,17.32 752.32,17.68 ccw(c795,60.36) 795,0 1275,0 ccw(c1275,25) 1300,25 1300,1575 ccw(c1275,1575) 1275,1600 25,1600 ccw(c25,1575) 0,1575 0,25 ccw(c25,25)
GND on Bottom Layer "Bottom Layer" (hatched 45Degree grid 4 track 6, remove dead copper, pour order 5): 25,0 105,0 ccw(c105,60.36) 147.68,17.68 172.32,42.32 cw(c215,-0.36) 215,60 315,60 cw(c315,-0.36) 357.68,42.32 382.32,17.68 ccw(c425,60.36) 425,0 565,0 ccw(c565,60.36) 607.68,17.68 607.32,17.32 cw(c650,-25.36) 650,35 710,35 cw(c710,-25.36) 752.68,17.32 752.32,17.68 ccw(c795,60.36) 795,0 1275,0 ccw(c1275,25) 1300,25 1300,1575 ccw(c1275,1575) 1275,1600 25,1600 ccw(c25,1575) 0,1575 0,25 ccw(c25,25)

## Other copper
Top Layer:
  pour cut-out: 0.39,1195 1299.61,1195 1299.61,1600 0.39,1600
  pour cut-out: 435,1195 350,1195 350,830 435,830
  pour cut-out: 946.81,975 861.81,975 861.81,774.88 946.81,774.88
  pour cut-out: 100,1195 0,1195 0,1025 100,1025
Bottom Layer:
  pour cut-out: 0.39,1195 1299.61,1195 1299.61,1600 0.39,1600

## Silkscreen, mask and mechanical layers (free items; w line width, h text height)
Top Overlay:
  circle w20: c1075,345 r8.63
  region: 957.6,345 1007.6,320 1000,340 1045,340 1045,350 1000,350 1007.6,370
  region: 1075,462.4 1050,412.4 1070,420 1070,375 1080,375 1080,420 1100,412.4
  region: 382,328 387,333 387,377 382,382 338,382 333,377 333,333 338,328
  region: 91.38,650.04 111.38,670.04 111.38,630.04
  region: 111.38,550.04 91.38,530.04 91.38,570.04
  lines w2: 957.6,345 1007.6,370 1000,350 1045,350 1045,340 1000,340 1007.6,320 957.6,345 ; 1050,412.4 1075,462.4 1100,412.4 1080,420 1080,375 1070,375 1070,420 1050,412.4
  lines w6: 130,660 170,660 ; 137.5,650 162.5,650 ; 142.5,640 157.5,640 ; 150,660 150,675 ; 230,660 270,660 ; 237.5,650 262.5,650 ; 242.5,640 257.5,640 ; 250,660 250,675 ; 125,775 225,775 ; 125,775 125,675 225,675 ; 125,775 125,835 225,835 ; 225,675 225,775 ; 225,675 325,675 325,775 ; 225,775 325,775 ; 225,775 225,835 ; 225,835 325,835 325,775 ; 91.38,530.04 91.38,570.04 111.38,550.04 91.38,530.04 ; 91.38,650.04 111.38,670.04 111.38,630.04 91.38,650.04
  lines w10: 1057.5,313.19 ccw(c1080,340) 1105.92,363.52 ; 1100.67,355.16 1104.64,370 1117.94,362.32
  lines w12: 27.03,724.93 cw(c50,750) 27.03,775.07 ; 27.03,824.93 cw(c50,850) 72.97,824.93 ; 27.1,725 72.9,725 ; 27.1,775 72.9,775 ; 27.1,825 72.9,825 ; 72.97,724.93 ccw(c50,750) 72.97,775.07 ; 1227.03,24.93 cw(c1250,50) 1227.03,75.07 ; 1227.03,124.93 cw(c1250,150) 1272.97,124.93 ; 1227.1,25 1272.9,25 ; 1227.1,75 1272.9,75 ; 1227.1,125 1272.9,125 ; 1272.97,24.93 ccw(c1250,50) 1272.97,75.07
  text "EXT" at 15,1175 h60
  text "SCK" at 1210,1175 h60
  text "RX" at 260,1135 h60 r90
  text "TX" at 310,1135 h60 r90
  text "SFD" at 210,1125 h60 r90
  text "ROK" at 160,1120 h60 r90
  text "v1.0" at 1175,1085 h70 r90
  text "WK" at 0,1074.59 h60
  text "SDO" at 1210,1074.59 h60
  text "IO7" at 15,975 h60
  text "SDI" at 1215,975 h60
  text "CS" at 1225,875 h60
  text "PHA" at 131,790 h60
  text "POL" at 235,790 h60
  text "PB6" at 1210,775 h60
  text "A2" at 25,675 h60
  text "PB7" at 1210,675 h60
  text "A3" at 25,575 h60
  text "KitSprout" at 1075,575 h180 r90
  text "KDWM1000" at 1180,575 h120 r90
  text "3V3" at 1210,575 h60
  text "X" at 1099.6,522.5 h100 r180
  text "B12" at 10,475 h60
  text "SWD" at 1205,475 h60
  text "B13" at 10,375 h60
  text "SWC" at 1205,375 h60
  text "Y" at 911.6,318.5 h100
  text "Z" at 1158.6,300.5 h100 r180
  text "B14" at 10,275 h60
  text "GND" at 1200,275 h60
  text "B15" at 10,175 h60
  text "A8" at 25,75 h60
  text "B" at 110,15 h70
  text "U" at 390,15 h70
Bottom Overlay:
  circle w12: c460,305 r6
  circle w12: c520,305 r6
  circle w12: c580,305 r6
  circle w12: c640,305 r6
  region: 155,95 165,95 165,85 175,85 175,75 165,75 165,65 155,65 155,75 145,75 145,85 155,85
  region: 355,80 385,80 385,70 355,70
  lines w2: 145,75 155,75 155,65 165,65 165,75 175,75 175,85 165,85 165,95 155,95 155,85 145,85 145,75 ; 355,70 355,80 385,80 385,70 355,70
  text "UWB DWM1000" at 435,345 h80 r270
  text "LPS25H" at 495,345 h80 r270
  text "MPU9250" at 555,345 h80 r270
  text "STM32F411CE" at 615,345 h80 r270
  text "Development Kit" at 755,270 h120 r270
  text "Local Positioning Sys." at 855,270 h120 r270
  text "KitSprout" at 1015,270 h180 r270
Mechanical 1:
  lines w2: 607.32,17.32 cw(c650,-25.36) 650,35 710,35 cw(c710,-25.36) 752.68,17.32 ; 607.68,17.68 cw(c565,60.36) 565,0 425,0 cw(c425,60.36) 382.32,17.68 357.68,42.32 ccw(c315,-0.36) 315,60 215,60 ccw(c215,-0.36) 172.32,42.32 147.68,17.68 cw(c105,60.36) 105,0 ; 752.32,17.68 ccw(c795,60.36) 795,0 1275,0 ccw(c1275,25) 1300,25 1300,1575 ccw(c1275,1575) 1275,1600 25,1600 ccw(c25,1575) 0,1575 0,25 ccw(c25,25) 25,0 105,0 ; 105,0 ccw(c105,0) 105,0